# EAGLE board Eagle_assign (EAGLE 9.5.2)
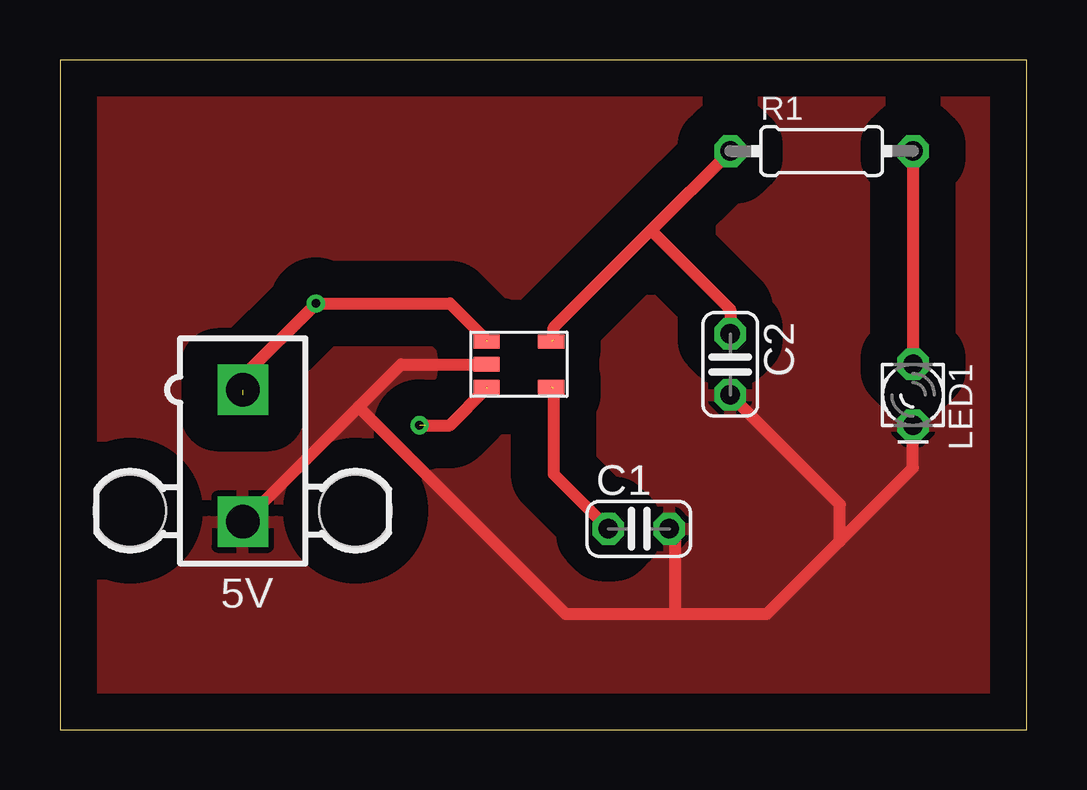
[diagram p0: board, top side]
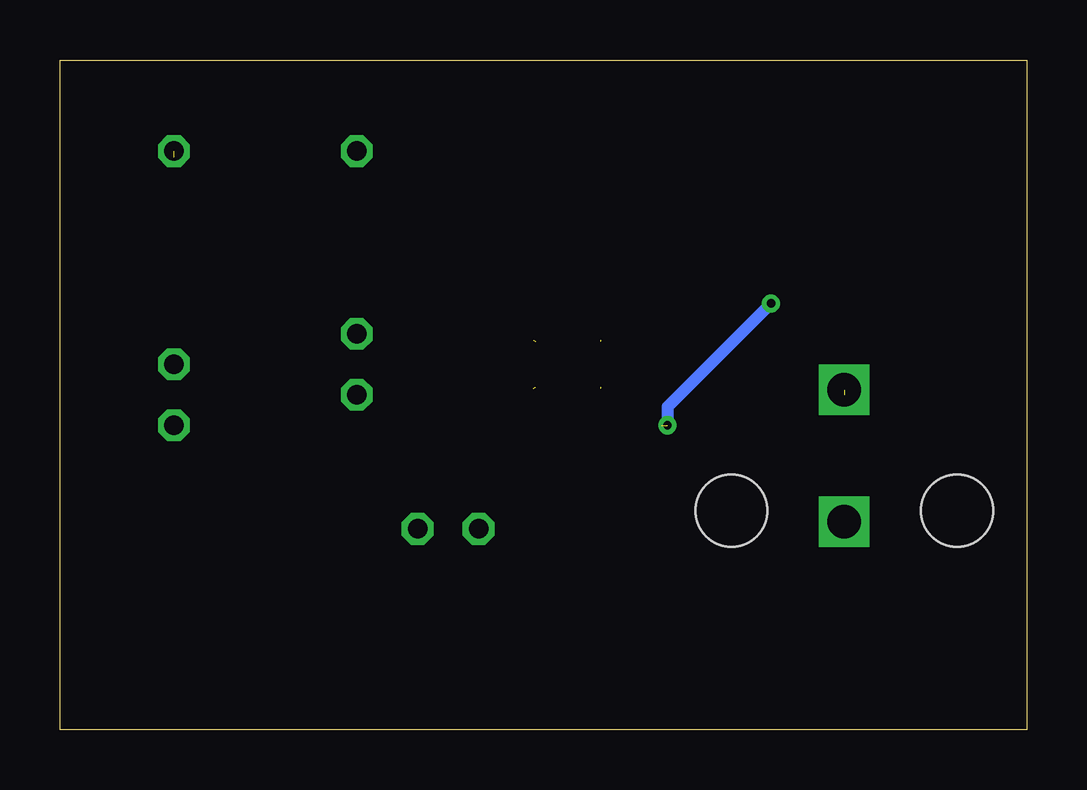
[diagram p1: board, bottom side, seen from below]

Size 40.31 x 27.93 mm. Coordinates in mm from the lower left corner, seen from the top.
Outline: 0,0 40.31,0 40.31,27.93 0,27.93 0,0
Copper layers (1*16): Top 0.035mm / dielectric 1.5mm / Bottom 0.035mm
Design rules "default": minimum track width 6mil, minimum drill 0.35mm, track to track 6mil, track to pad 6mil, pad to pad 6mil, via to via 6mil, smd to smd 6mil, copper to edge 40mil, drill to drill 6mil, minimum pad ring 10mil, minimum via ring 8mil, stop-mask expansion 4mil, vias tented up to drill 0mil, thermal gap 10mil

## Footprints (pad centres in the part's own frame; a part is rotated, then mirrored left to right if it is on the bottom)
5566-2 = drill 1.4 square: 1 0,-2.75; 2 0,2.75 | hole 3: 4.7,2.29; -4.7,2.29
C025-024X044 = drill 0.813 octagon: 1 -1.27,0; 2 1.27,0
LD260 = drill 0.813 octagon: A -1.27,0; K 1.27,0
0204/7 = drill 0.813 octagon: 1 -3.81,0; 2 3.81,0
TPS799 = smd 1.1 x 0.6: EN 0,-0.95; GND 0,0; IN 0,0.95; NR 2.7,-0.95; OUT 2.7,0.95

## Placement (x,y rotation side)
5V  5566-2  [5566-2]  7.62,11.43 180 top
C1  0.01uF  [C025-024X044]  24.13,8.38 0 top
C2  2.2uF  [C025-024X044]  27.94,15.24 270 top
LED1  [LD260]  35.56,13.97 270 top
R1  100  [0204/7]  31.75,24.13 0 top
U$1  TPS799  [TPS799]  17.78,15.24 0 top

## Library data of the parts
5V = con-molex; MF: MOLEX; OC_FARNELL: 1822072; OC_NEWARK: unknown
C1 C2 = rcl; SPICEPREFIX: C
LED1 = led
R1 = rcl; SPICEPREFIX: R
U$1 = Eagle_assign

## Nets
GND: 5V.2 C1.2 C2.2 LED1.K U$1.GND
N$1: C2.1 R1.1 U$1.OUT
N$2: LED1.A R1.2
N$3: C1.1 U$1.NR
N$4: 5V.1 U$1.EN U$1.IN

## Tracks (layer width: path | path; a pad name or v marks a point on that pad's centre or on a via)
GND
  Top 0.508: 7.62,8.64 12.45,13.46 | 12.45,13.46 14.22,15.24 U$1.GND | 12.45,13.46 21.08,4.83 25.65,4.83 | 25.65,4.83 25.65,8.13 C1.2 | 25.65,4.83 29.46,4.83 32.51,7.87 | 32.51,7.87 35.56,10.92 35.56,12.45 | 32.51,7.87 32.51,9.4 C2.2
  pour Top (isolate 1.524): 0,27.94 0,0 40.39,0 40.39,27.94
N$1  (1 unrouted)
  Top 0.508: 20.57,16.26 20.57,16.76 24.64,20.83 | 24.64,20.83 R1.1 | 24.64,20.83 27.94,17.53 C2.1
N$2  (1 unrouted)
  Top 0.508: 35.56,23.88 LED1.A
N$3  (1 unrouted)
  Top 0.508: 20.57,14.22 20.57,10.67 C1.1
N$4  (via drill 0.35)  (4 unrouted)
  Top 0.508: 7.62,13.97 7.62,14.73 v10.67,17.78 16.26,17.78 17.78,16.26 | 15.24,12.7 16.26,12.7 17.78,14.22
  Bottom 0.508: v10.67,17.78 14.99,13.46 v14.99,12.7